# Altium PCB FxPedalEffects.PcbDoc
Units mil, origin at the board's own origin, x right, y up, seen from the top; angles counter-clockwise.
Board outline 6000 x 4000 mil, 2 copper layers (Top Layer, Bottom Layer); 7 components, 15 nets, 49 pads, 0 vias.
Unrouted connection lines stored in the file: 20.
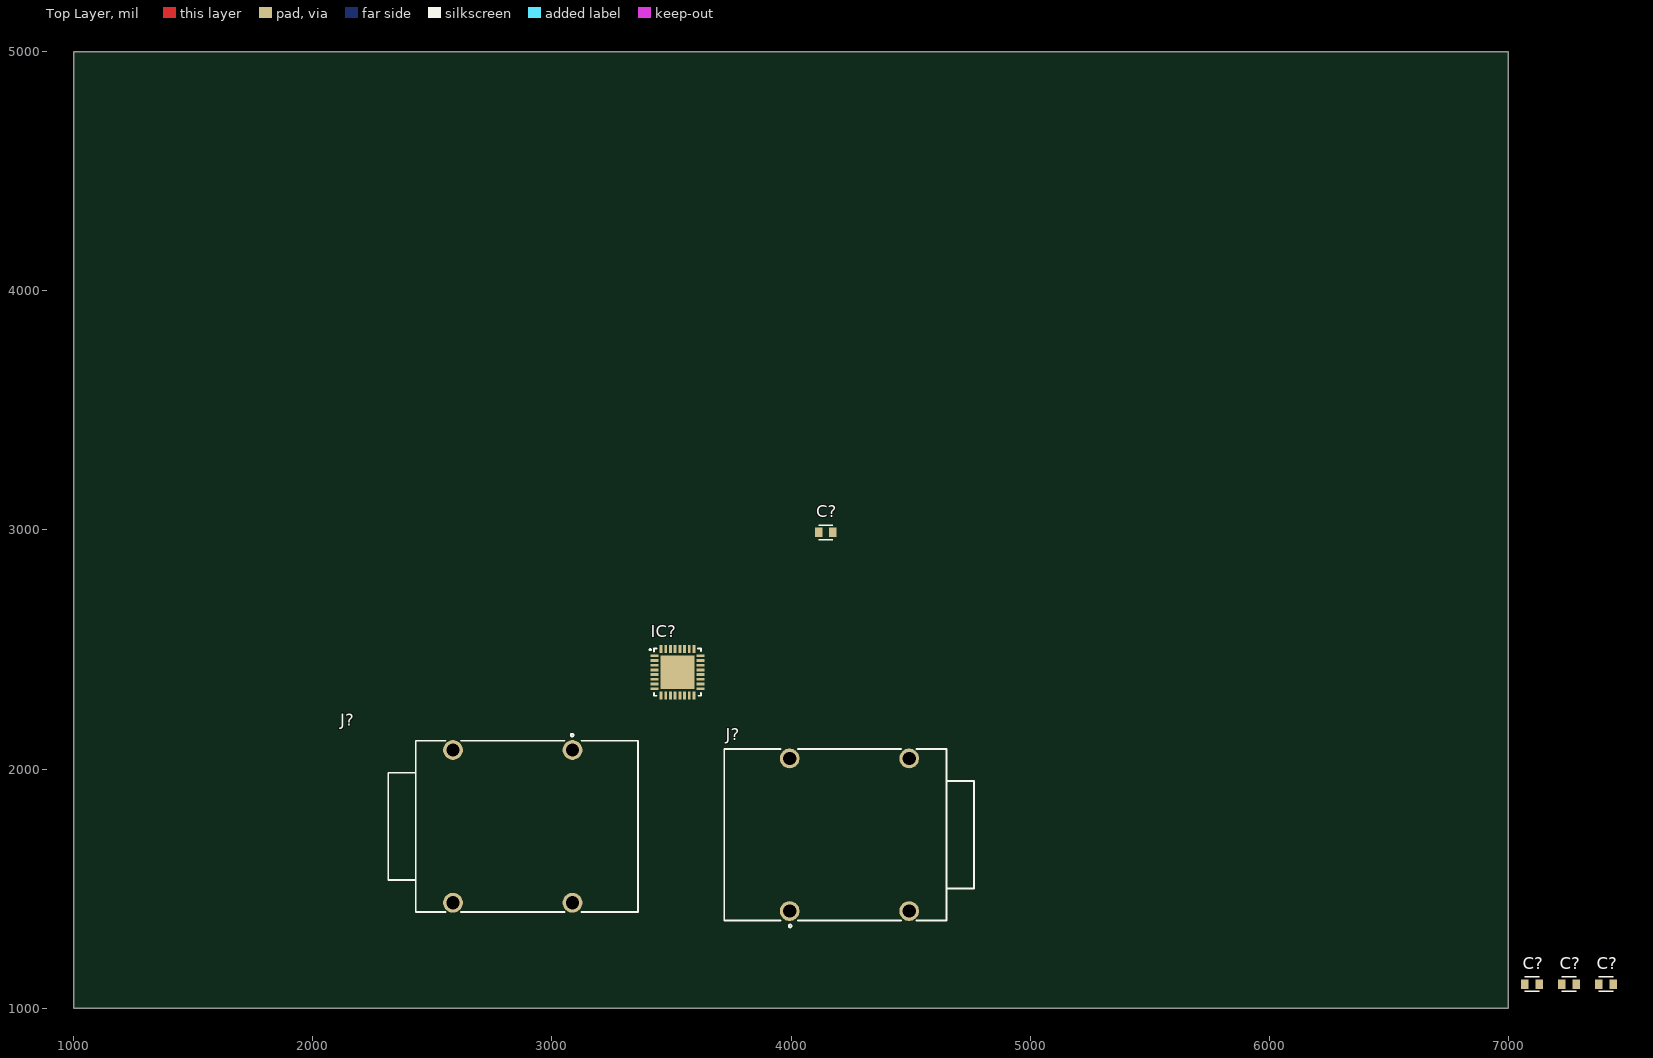
[diagram p0: Top Layer view]
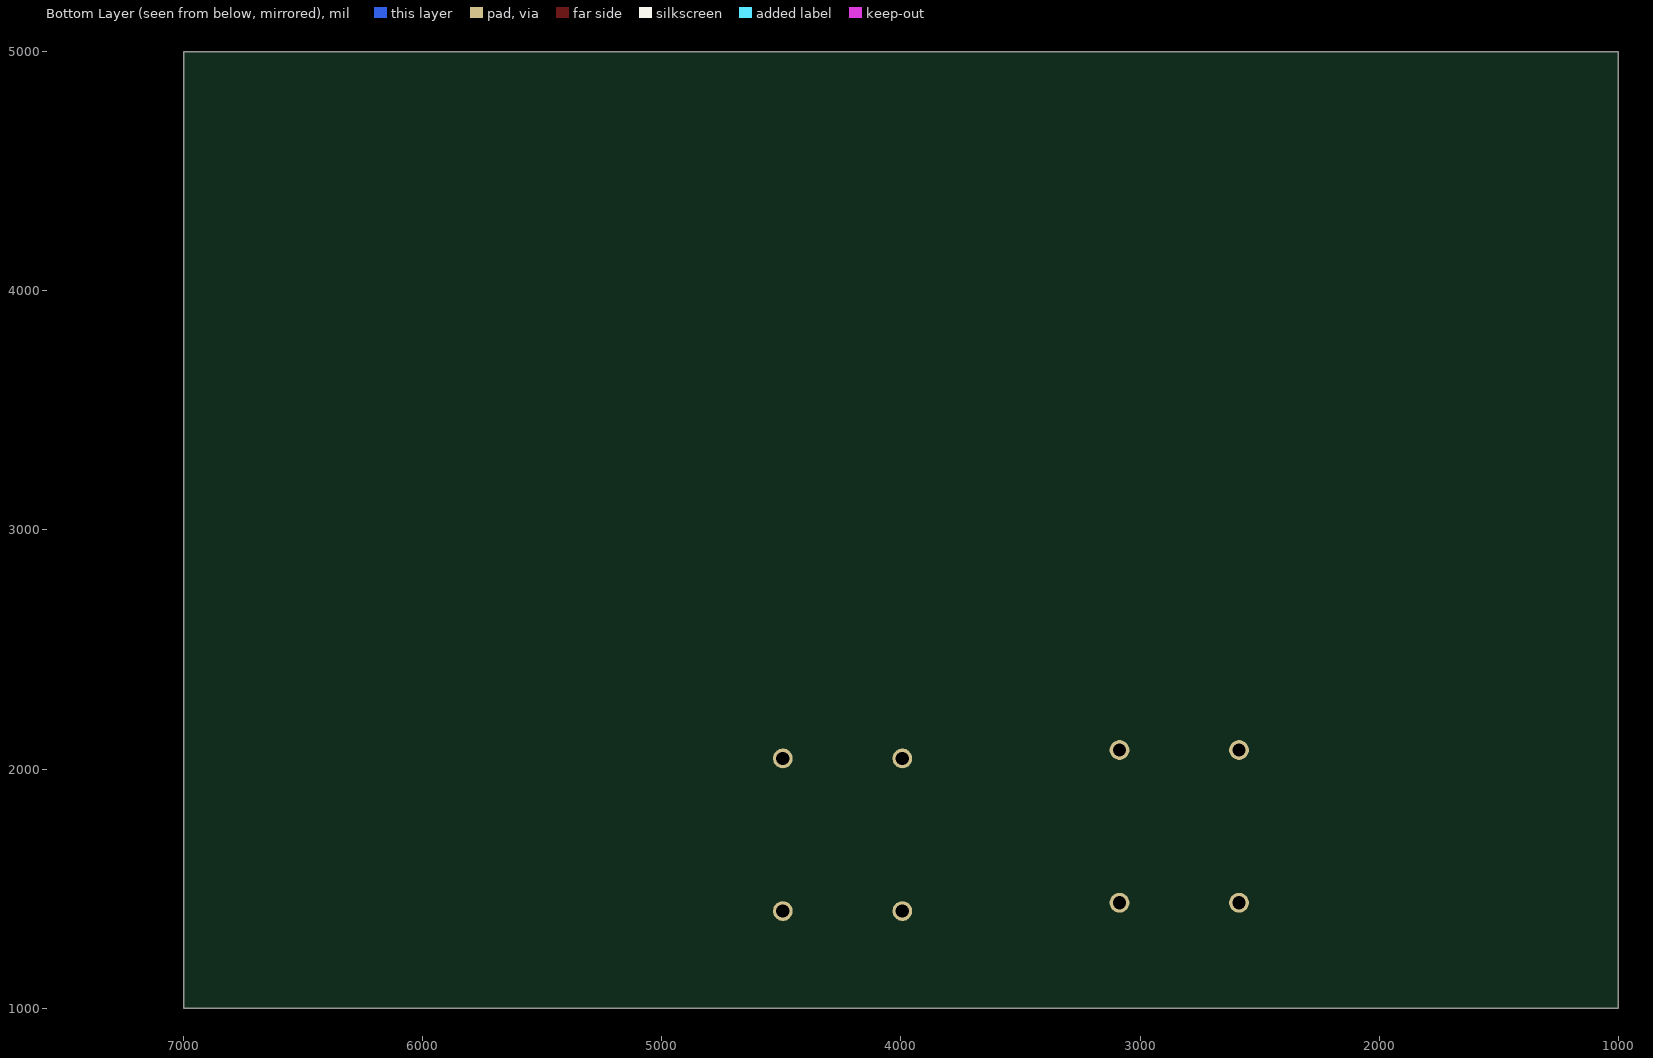
[diagram p1: Bottom Layer view, seen from below]

## Layer stack, top to bottom
Top Solder: solder mask 0.4, Solder Resist, Dk 3.5
Top Layer: signal copper 1.4
Dielectric 1: dielectric 12.6, FR-4, Dk 4.8
Bottom Layer: signal copper 1.4
Bottom Solder: solder mask 0.4, Solder Resist, Dk 3.5

## Board outline
1000,1000 7000,1000 7000,5000 1000,5000

## Design rules (kind name [scope] priority, off if disabled: settings)
Clearance [All] p1: gap=10 ignorepadtopadclearanceinfootprint=FALSE except(0: Arc-Hole Track-Hole SMDPad-Hole THPad-Hole Via-Hole Fill-Hole Poly-Hole Region-Hole Text-Hole)
PolygonConnect [All] p1: connectstyle=Relief reliefconductorwidth=10 reliefentries=4 polygonreliefangle="90 Angle" airgapwidth=10
RoutingVias [All] p1: holewidth=28 width=50 viastyle="Through Hole" minholewidth=28 minwidth=50 maxholewidth=28 maxwidth=50
SolderMaskExpansion [All] p1: expansion=4 istentingtop=FALSE
Width [All] p1: maxlimit=10 minlimit=10 preferedwidth=10
30 further rules are at their usual default settings.

## Classes and differential pairs
component class "Audio Codec": C? IC? J?

## Components (designator, comment, footprint, x,y, rotation, side; value= is the part's Value field where it differs from the comment)
C? "0.1uF/16V" C0603 7255,1100 r0 top
C? "0.1uF/16V" C0603 7410,1100 r0 top
C? "0.1uF/16V" C0603 7100,1100 r0 top
C? "0.1uF/16V" C0603 4145,2990 r0 top
IC? "SGTL5000XNAA3R2" QFN32 3525,2405 r0 top
J? "NMJ4HCD2" NMJ4HCD2 2430,1760 r180 top
J? "NMJ4HCD2" NMJ4HCD2 4650,1725 r0 top

## Footprints (in the part's own frame and the unit in brackets; to place one, negate y for a bottom-side part, rotate by r counter-clockwise, add the part's x,y. Pads: shape width x height; smd on the part's side, far side on the other; paste and mask are expansions set on the pad)
C0603 [mm]
  rect 0.8x1.02 smd: 1(-0.759,0) 2(0.759,0)
  silkscreen extent -0.76,-0.76 0.76,0.76, body extent -0.8,-0.4 0.8,0.4, height 0.81
NMJ4HCD2 [mm]
  round 2.1 hole 1.4: 1(-16.655,-8.115) 2(-3.955,-8.115) 3(-3.955,8.115) 4(-16.655,8.115)
  silkscreen extent -23.61,-9.84 2.92,9.1, body extent -23.52,-9.14 8.28,9.06, height 15.95
QFN32 [mm]
  rect 0.85x0.3 smd: 1(-2.45,1.75) 2(-2.45,1.25) 3(-2.45,0.75) 4(-2.45,0.25) 5(-2.45,-0.25) 6(-2.45,-0.75) 7(-2.45,-1.25) 8(-2.45,-1.75) 17(2.45,-1.75) 18(2.45,-1.25) 19(2.45,-0.75) 20(2.45,-0.25) 21(2.45,0.25) 22(2.45,0.75) 23(2.45,1.25) 24(2.45,1.75)
  rect 0.3x0.85 smd: 9(-1.75,-2.45) 10(-1.25,-2.45) 11(-0.75,-2.45) 12(-0.25,-2.45) 13(0.25,-2.45) 14(0.75,-2.45) 15(1.25,-2.45) 16(1.75,-2.45) 25(1.75,2.45) 26(1.25,2.45) 27(0.75,2.45) 28(0.25,2.45) 29(-0.25,2.45) 30(-0.75,2.45) 31(-1.25,2.45) 32(-1.75,2.45)
  rect 3.6x3.6 smd: 33(0,0)
  silkscreen extent -2.97,-2.5 2.5,2.5, body extent -2.55,-2.55 2.55,2.55, height 0.9

## Part data
C? C? C? C?: library part "C0603 0.1uF/16V", "MLCC 0.1UF, 16V, X5R, 10%, 0603.", Capacitance=100nF, Case Code (Imperial)=0603, Case Code (Metric)=1608, Dielectric=X5R, Manufacturer="Kyocera AVX", Manufacturer Part Number=0603YD104KAT2A, Max Operating Temperature=85°C, Min Operating Temperature=-55°C, Package Quantity=4000, Supplier Part Number 1=581-0603YD104KAT2A, Tolerance=10%, Voltage Rating=16V, Case/Package=0603, Category="Ceramic Capacitors", ComponentLink1Description=https://datasheet.ciiva.com/11504/cx5r-11504040.pdf?src-supplier=Avnet, ComponentLink1URL=https://datasheet.ciiva.com/11504/cx5r-11504040.pdf?src-supplier=Avnet, ComponentLink2Description=https://datasheet.ciiva.com/208/cx5r-208121.pdf?src-supplier=Digi-Key, ComponentLink2URL=https://datasheet.ciiva.com/208/cx5r-208121.pdf?src-supplier=Digi-Key, Depth=0.81mm, Height=0.9mm, Lead Free="Lead Free", Length=1.6mm, Mount="Surface Mount", Number of Pins=2, Packaging="Tape and Reel", Pricing 1="1=0.26000, 10=0.11400, 50=0.11400, 100=0.09700, 1000=0.05900, 10000=0.04800 (USD)", RoHS=Yes, Stock 1=3315, Supplier 1=Mouser, Termination=SMD/SMT, Thickness=0.035inch, Voltage Rating (DC)=16V, Width=0.81mm
IC?: "Integrated Circuit", Manufacturer_Name=NXP, Mouser Part Number=841-SGTL5000XNAA3R2, Arrow Part Number=SGTL5000XNAA3R2, Arrow Price/Stock=https://www.arrow.com/en/products/sgtl5000xnaa3r2/nxp-semiconductors, Datasheet Link=http://www.nxp.com/docs/en/data-sheet/SGTL5000.pdf, Height=0.9mm, Manufacturer_Part_Number=SGTL5000XNAA3R2, Mouser Price/Stock=https://www.mouser.co.uk/ProductDetail/NXP-Semiconductors/SGTL5000XNAA3R2?qs=g5o6z0NmdpTo1sUyP1uGYA%3D%3D
J? J?: library part "TS Audio Jack 6.3mm", "Phone Connectors 2C MONO 2-SPST NC", Color=Black, Manufacturer=Neutrik, Max Current Rating=3A, Max Operating Temperature=70°C, Min Operating Temperature=-25°C, Package Quantity=200, Supplier Part Number 1=550-12202, Voltage Rating=50V, Category="Audio / Video Connectors", ComponentLink1Description=https://datasheet.ciiva.com/16148/210-199761-16148179.pdf?src-supplier=Onlinecomponents.com, ComponentLink1URL=https://datasheet.ciiva.com/16148/210-199761-16148179.pdf?src-supplier=Onlinecomponents.com, Contact Material=Brass, Contact Plating=Silver, Gender=Female, Housing Material=Polyamide, Manufacturer Part Number=NMJ4HCD2, Mount="Through Hole", Number of Contacts=2, Number of Pins=4, Number of Ports=1, Number of Terminals/Pins=4, Orientation=Horizontal, Pricing 1="1=1,51000, 10=1,39000, 50=1,36000, 100=1,18000, 1000=1,11000, 10000=1,10000 (USD)", RoHS=Yes, RoHS Compliant=Yes, Series=M, Stock 1=39770, Supplier 1=Mouser, Termination="Through Hole", Weight=0.246918oz

## Nets (pads, with @x,y where several pads share a name; then routed paths per layer and width w, separated by ;. In a path a pad name is that pad's centre, name@x,y a point inside that pad or via, vN(x,y) a via of type N, cw(c..) or ccw(c..) an arc to the next point about the centre after c; other vN are vias at no path point)
1.8V: IC?.5
3.3V: C?.1@4115.12,2990 C?.1@7225.12,1100 C?.1@7380.12,1100 IC?.20 IC?.30
AGND: IC?.7 J?.1 J?.2 J?.3
CGND: C?.2@7129.88,1100
GND: C?.2@4174.88,2990 C?.2@7284.88,1100 C?.2@7439.88,1100 IC?.1 IC?.3 IC?.31 IC?.32 IC?.33
NetC?_1: C?.1@7070.12,1100 IC?.10
NetIC?_11: IC?.11 J?.4@3994.29,2044.49
NetIC?_13: IC?.13 J?.4@3085.71,1440.51
NetIC?_21: IC?.21
NetIC?_23: IC?.23
NetIC?_24: IC?.24
NetIC?_25: IC?.25
NetIC?_26: IC?.26
NetIC?_27: IC?.27
NetIC?_29: IC?.29
pads on no net: IC?.2 IC?.4 IC?.6 IC?.8 IC?.9 IC?.12 IC?.14 IC?.15 IC?.16 IC?.17 IC?.18 IC?.19 IC?.22 IC?.28